# EAGLE board board (EAGLE 5.06)
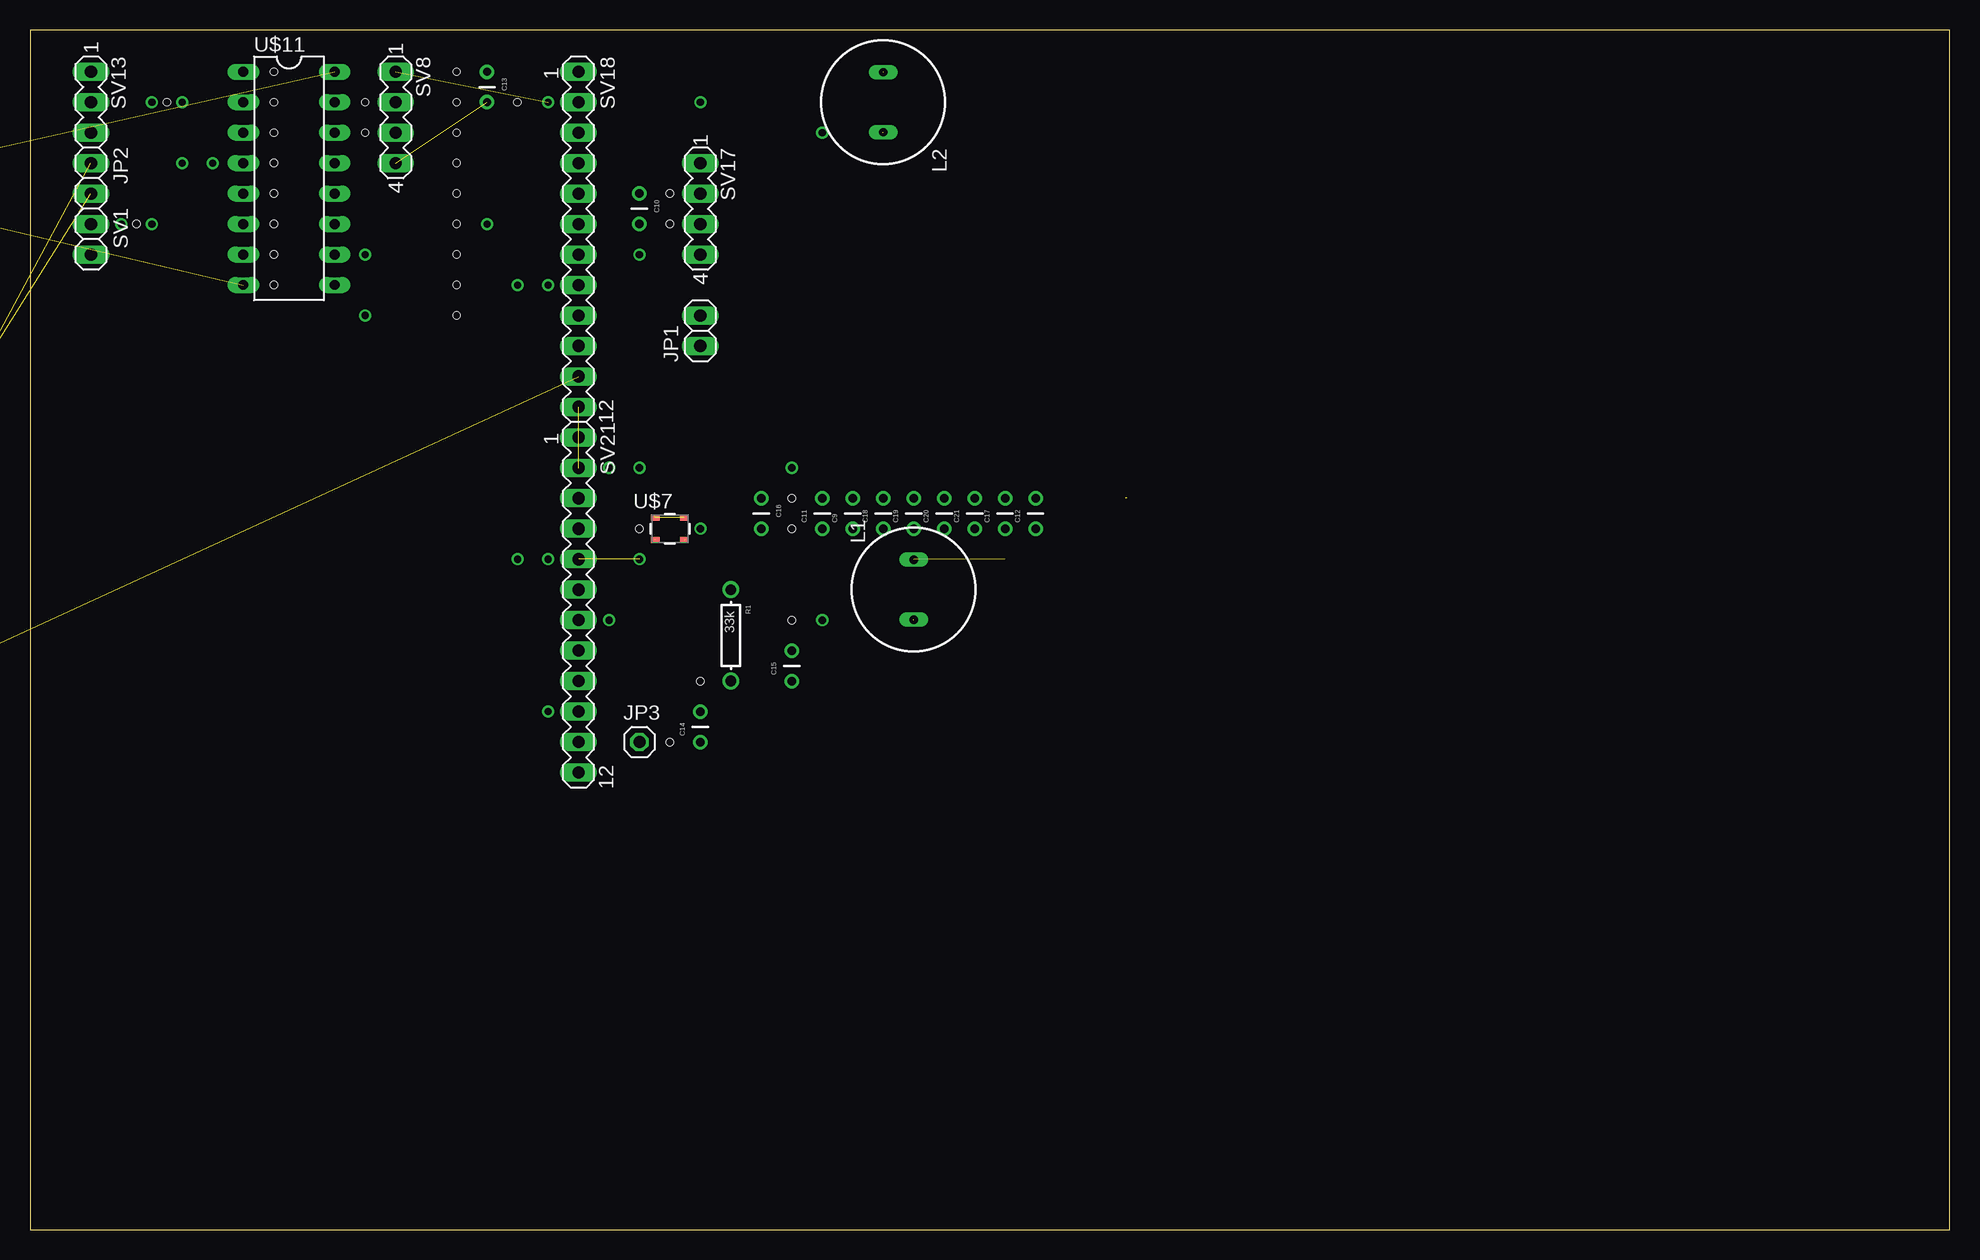
[diagram p0: board, top side]
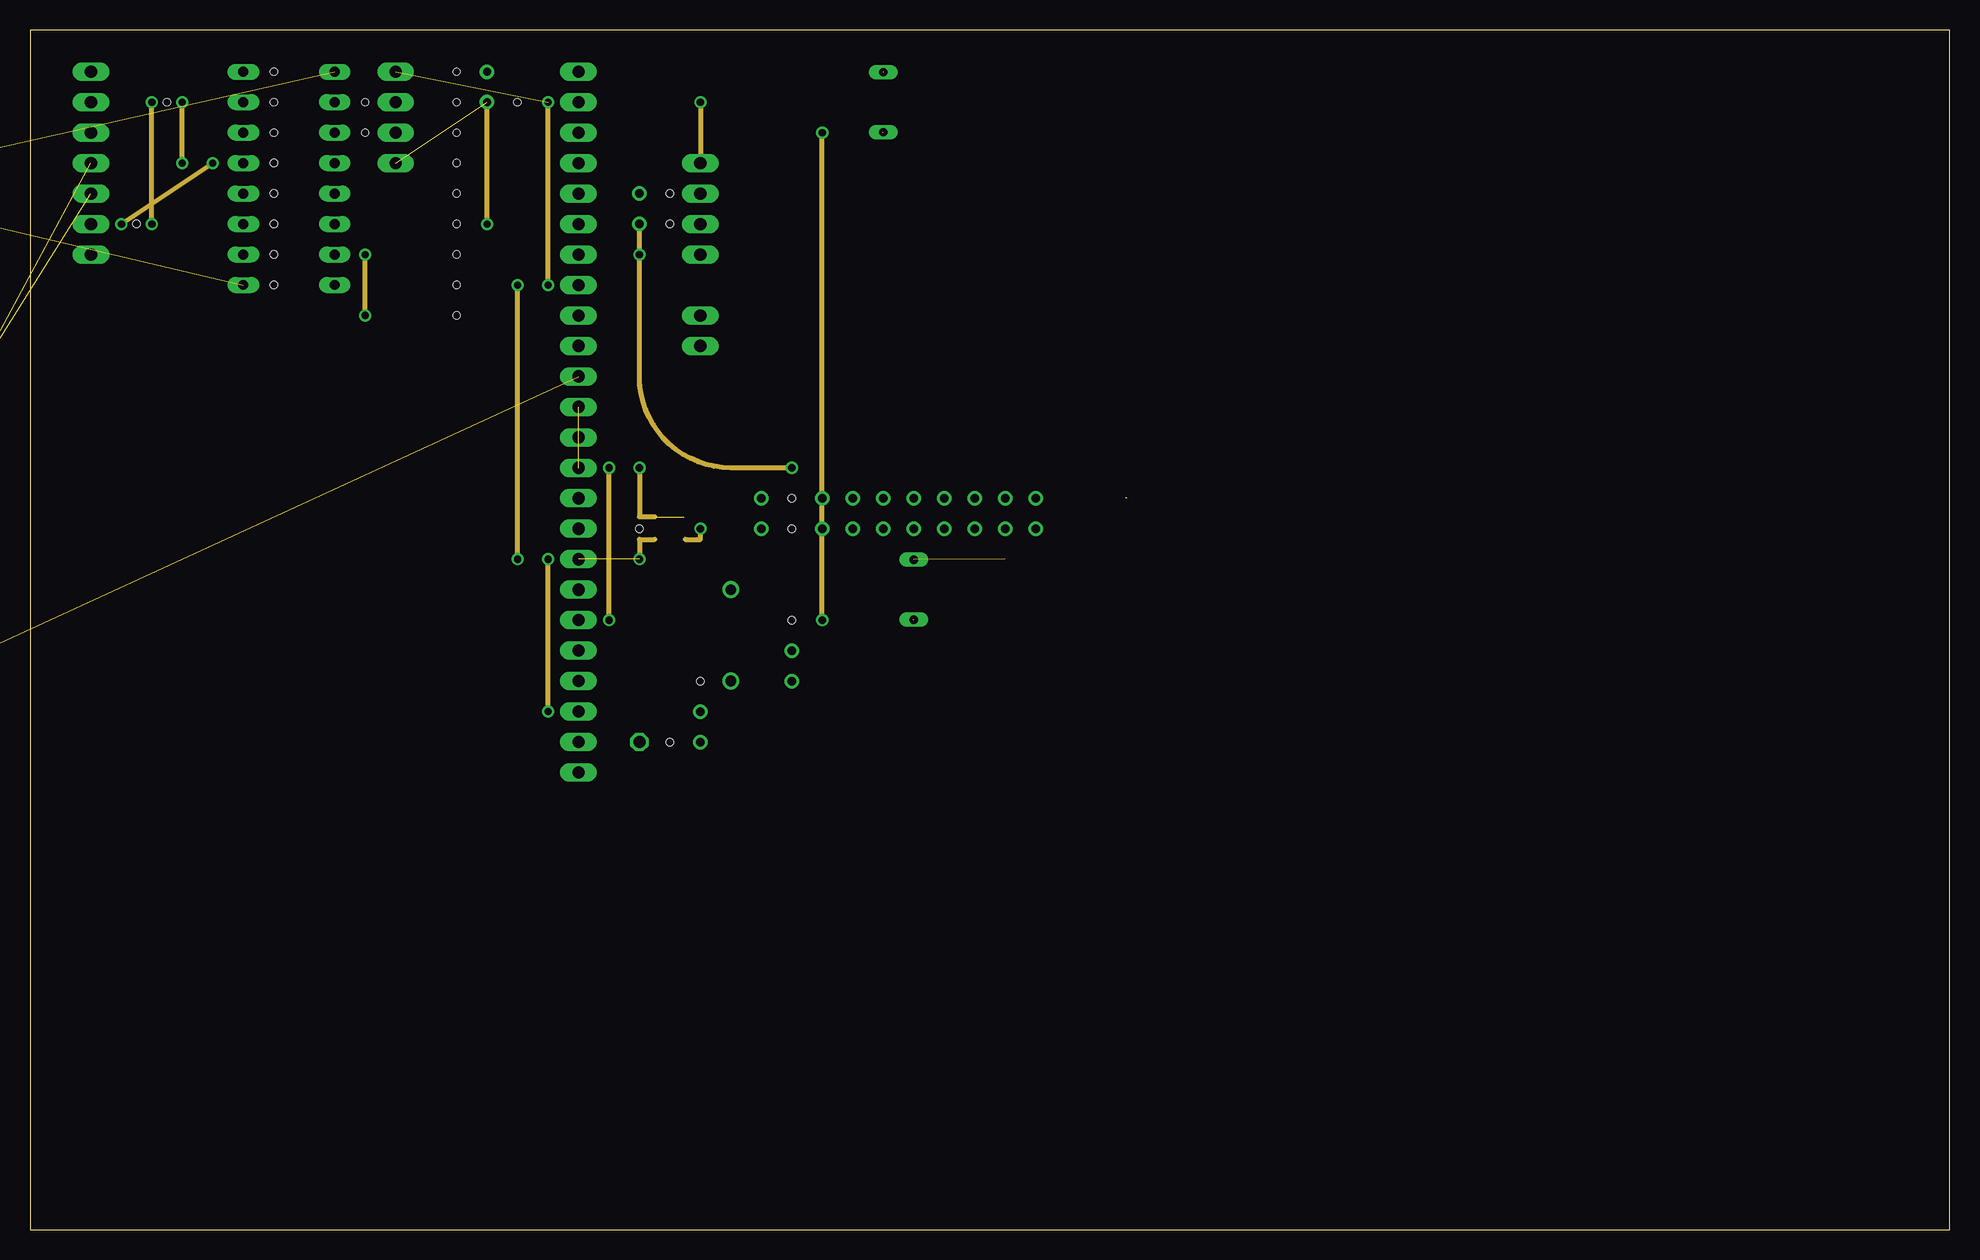
[diagram p1: board, inner layer Route15]
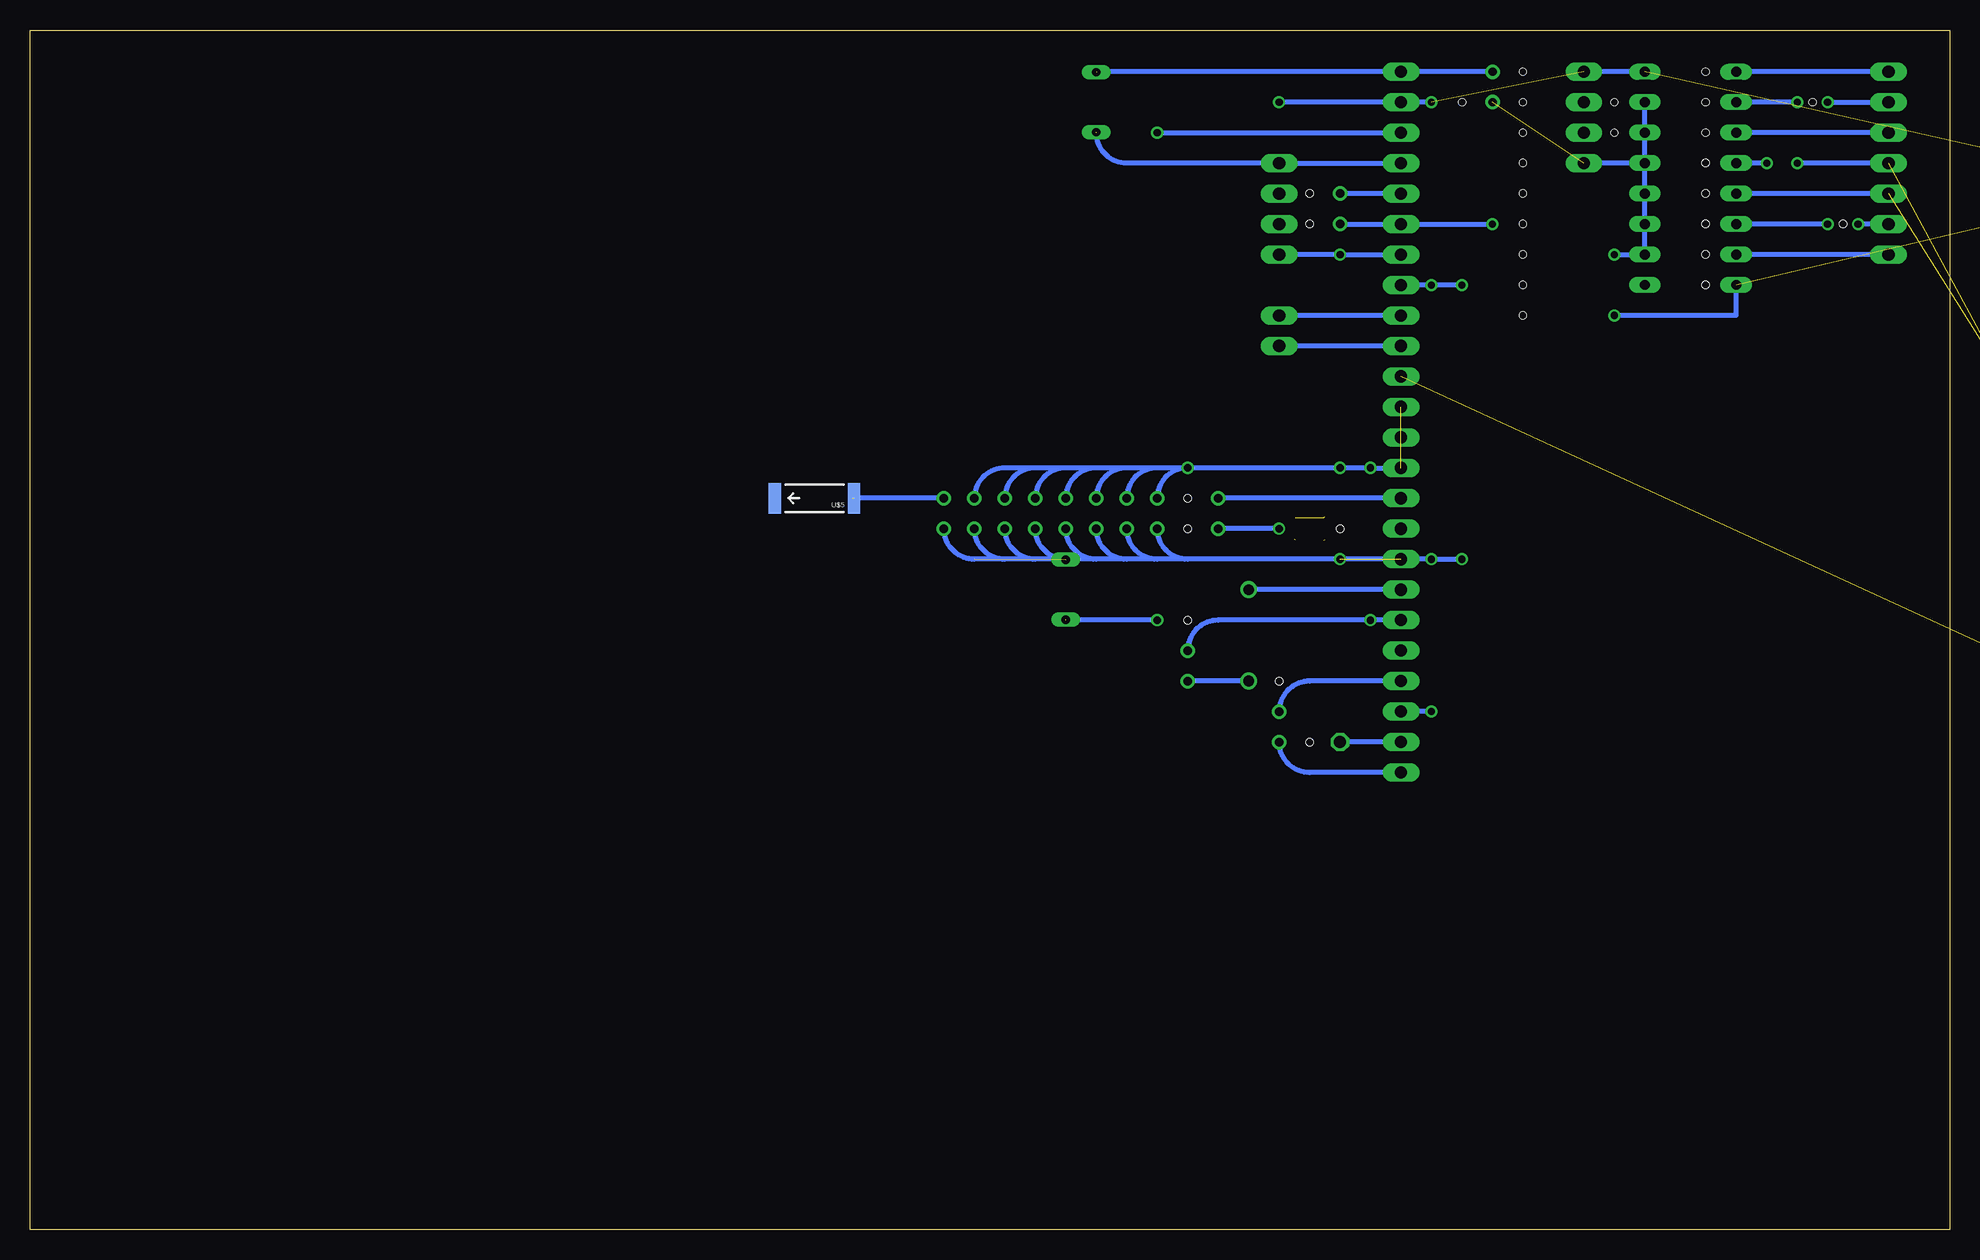
[diagram p2: board, bottom side, seen from below]

Size 160 x 100 mm. Coordinates in mm from the lower left corner, seen from the top.
Outline: 0,0 160,0 160,100 0,100 0,0
Copper layers (1*16): Top 0.035mm / dielectric 1.5mm / Bottom 0.035mm
Design rules "default": minimum track width 10mil, minimum drill 24mil, track to track 8mil, track to pad 8mil, pad to pad 8mil, via to via 8mil, smd to smd 8mil, copper to edge 40mil, drill to drill 8mil, minimum pad ring 10mil, minimum via ring 8mil, stop-mask expansion 4mil, vias tented up to drill 0mil, thermal gap 10mil
Holes 0.6 mm at 20.32,96.52 20.32,93.98 20.32,91.44 20.32,88.9 20.32,86.36 20.32,83.82 20.32,81.28 20.32,78.74 35.56,96.52 35.56,93.98 35.56,91.44 35.56,88.9 35.56,86.36 35.56,83.82 35.56,81.28 35.56,78.74 53.34,40.64 55.88,45.72 40.64,93.98 53.34,86.36 53.34,83.82 27.94,93.98 27.94,91.44 8.89,83.82 11.43,93.98 35.56,76.2 63.5,60.96 63.5,58.42 50.8,58.42 63.5,50.8

## Footprints (pad centres in the part's own frame; a part is rotated, then mirrored left to right if it is on the bottom)
C0402 = smd 0.7 x 0.9: 1 -0.65,0; 2 0.65,0
CAP-PTH-SMALL = drill 0.7 round: 1 0,0; 2 2.54,0
DF12(XX)-20DP-0.5V = smd 0.3 x 1.8: 1 -2.25,-1.9 | smd 0.3 x 1.6: 2 -2.25,1.8; 3 -1.75,-1.8; 4 -1.75,1.8; 5 -1.25,-1.8; 6 -1.25,1.8; 7 -0.75,-1.8; 8 -0.75,1.8; 9 -0.25,-1.8; 10 -0.25,1.8; 11 0.25,-1.8; 12 0.25,1.8; 13 0.75,-1.8; 14 0.75,1.8; 15 1.25,-1.8; 16 1.25,1.8; 17 1.75,-1.8; 18 1.75,1.8; 19 2.25,-1.8; 20 2.25,1.8 | smd 0.8 x 1.8: T1 4,0; T2 -4,0 | hole 0.635: 3.3,1.5; -3.3,1.5
DF12-20DS-0.5V = smd 0.3 x 1.8: 1 2.25,-1.9 | smd 0.3 x 1.6: 2 2.25,1.8; 3 1.75,-1.8; 4 1.75,1.8; 5 1.25,-1.8; 6 1.25,1.8; 7 0.75,-1.8; 8 0.75,1.8; 9 0.25,-1.8; 10 0.25,1.8; 11 -0.25,-1.8; 12 -0.25,1.8; 13 -0.75,-1.8; 14 -0.75,1.8; 15 -1.25,-1.8; 16 -1.25,1.8; 17 -1.75,-1.8; 18 -1.75,1.8; 19 -2.25,-1.8; 20 -2.25,1.8 | smd 0.8 x 1.8: T1 4,0; T2 -4,0 | hole 0.635: 3.3,1.5; -3.3,1.5
1X02 = drill 1.016 long: 1 -1.27,0; 2 1.27,0
1X01 = drill 1.016 octagon: 1 0,0
BS11 = drill 0.7 long: 1 -2.5,0; 2 2.5,0
AXIAL-0.3 = drill 0.9 round: P$1 -3.81,0; P$2 3.81,0
0805 = smd 0.8 x 1.2: 1 -0.9,0; 2 0.9,0
1X05 = drill 1.016 round: 1 0,0; 2 2.54,0; 3 5.08,0; 4 7.62,0; 5 10.16,0
MA04-1 = drill 1.016 long: 1 -3.81,0; 2 -1.27,0; 3 1.27,0; 4 3.81,0
MA06-1 = drill 1.016 long: 1 -6.35,0; 2 -3.81,0; 3 -1.27,0; 4 1.27,0; 5 3.81,0; 6 6.35,0
MA03-1 = drill 1.016 long: 1 -2.54,0; 2 0,0; 3 2.54,0
MA05-1 = drill 1.016 long: 1 -5.08,0; 2 -2.54,0; 3 0,0; 4 2.54,0; 5 5.08,0
MA12-1 = drill 1.016 long: 1 -13.97,0; 2 -11.43,0; 3 -8.89,0; 4 -6.35,0; 5 -3.81,0; 6 -1.27,0; 7 1.27,0; 8 3.81,0; 9 6.35,0; 10 8.89,0; 11 11.43,0; 12 13.97,0
TP09SQ = smd 0.9 x 0.9: TP 0,0
FH12A-10S-0.5SH(55) = smd 0.3 x 1.3: P$1 -2.25,0; P$2 -1.75,0; P$3 -1.25,0; P$4 -0.75,0; P$5 -0.25,0; P$6 0.25,0; P$7 0.75,0; P$8 1.25,0; P$9 1.75,0; P$10 2.25,0 | smd 3.6 x 2.2: P$11 -5.05,3.25; P$12 5.05,3.25
LFCSP-16 = smd 1.75 x 1.75: 0 0,0 | smd 0.65 x 0.37: 1 -1.75,0.975; 2 -1.75,0.325; 3 -1.75,-0.325; 4 -1.75,-0.975; 9 1.75,-0.975; 10 1.75,-0.325; 11 1.75,0.325; 12 1.75,0.975 | smd 0.37 x 0.65: 5 -0.975,-1.75; 6 -0.325,-1.75; 7 0.325,-1.75; 8 0.975,-1.75; 13 0.975,1.75; 14 0.325,1.75; 15 -0.325,1.75; 16 -0.975,1.75
SIGE4120 = smd 0.5 x 0.25: AGC_DIS -1.85,-1.25; FILT_BW 1.85,-0.75; FS_SEL1 1.85,-1.25; LNA_IN -1.85,0.25; P$16 1.85,0.25; VAGC -1.85,-0.75; VCC_AGC -1.85,0.75; VCC_LNA -1.85,1.25; VDD_FSE -1.85,-0.25; VDDQ 1.85,0.75; VTUNE 1.85,1.25; XTAL1 1.85,-0.25 | smd 0.25 x 0.5: CLK_OUT -0.25,-1.85; DATA_OUT 0.25,-1.85; FS_SEL0 1.25,-1.85; LNA_OUT -1.25,1.85; MIX_IN 0.25,1.85; OSC_EN 1.25,1.85; P$20 0.75,1.85; RX_EN -0.75,1.85; SYNC 0.75,-1.85; VCC -0.25,1.85; VDDN -0.75,-1.85; VSSN -1.25,-1.85 | smd 2.3 x 2.3: GND 0,0
ANTENNA-CHIP5 = smd 1.016 x 2.54: FEED -3.302,0; NC 3.302,0
TXCO = smd 0.7 x 0.5: P$1_GND -1.2,0.95; P$3_GND 1.2,0.95; P$4_OUTPUT 1.2,-0.95; P$6_VDD -1.2,-0.95
S-PQFP64-G64 = smd 1.2 x 0.3: 1 -5.7,3.75; 2 -5.7,3.25; 3 -5.7,2.75; 4 -5.7,2.25; 5 -5.7,1.75; 6 -5.7,1.25; 7 -5.7,0.75; 8 -5.7,0.25; 9 -5.7,-0.25; 10 -5.7,-0.75; 11 -5.7,-1.25; 12 -5.7,-1.75; 13 -5.7,-2.25; 14 -5.7,-2.75; 15 -5.7,-3.25; 16 -5.7,-3.75; 33 5.7,-3.75; 34 5.7,-3.25; 35 5.7,-2.75; 36 5.7,-2.25; 37 5.7,-1.75; 38 5.7,-1.25; 39 5.7,-0.75; 40 5.7,-0.25; 41 5.7,0.25; 42 5.7,0.75; 43 5.7,1.25; 44 5.7,1.75; 45 5.7,2.25; 46 5.7,2.75; 47 5.7,3.25; 48 5.7,3.75 | smd 0.3 x 1.2: 17 -3.75,-5.7; 18 -3.25,-5.7; 19 -2.75,-5.7; 20 -2.25,-5.7; 21 -1.75,-5.7; 22 -1.25,-5.7; 23 -0.75,-5.7; 24 -0.25,-5.7; 25 0.25,-5.7; 26 0.75,-5.7; 27 1.25,-5.7; 28 1.75,-5.7; 29 2.25,-5.7; 30 2.75,-5.7; 31 3.25,-5.7; 32 3.75,-5.7; 49 3.75,5.7; 50 3.25,5.7; 51 2.75,5.7; 52 2.25,5.7; 53 1.75,5.7; 54 1.25,5.7; 55 0.75,5.7; 56 0.25,5.7; 57 -0.25,5.7; 58 -0.75,5.7; 59 -1.25,5.7; 60 -1.75,5.7; 61 -2.25,5.7; 62 -2.75,5.7; 63 -3.25,5.7; 64 -3.75,5.7
VDFPN8 = smd 0.6 x 0.48: P$1 -3.65,1.905; P$2 -3.65,0.635; P$3 -3.65,-0.635; P$4 -3.65,-1.905; P$5 3.65,-1.905; P$6 3.65,-0.635; P$7 3.65,0.635; P$8 3.65,1.905
8-SOIC = smd 0.41 x 1.02: P$1-VOUT -0.975,-2.4; P$2-NC -0.325,-2.4; P$3-NC 0.325,-2.4; P$4-NC 0.975,-2.4; P$5-NC 0.975,2.4; P$6-NC 0.325,2.4; P$7-GND -0.325,2.4; P$8-VIN -0.975,2.4
DIL16 = drill 0.813 long: 1 -8.89,-3.81; 2 -6.35,-3.81; 3 -3.81,-3.81; 4 -1.27,-3.81; 5 1.27,-3.81; 6 3.81,-3.81; 7 6.35,-3.81; 8 8.89,-3.81; 9 8.89,3.81; 10 6.35,3.81; 11 3.81,3.81; 12 1.27,3.81; 13 -1.27,3.81; 14 -3.81,3.81; 15 -6.35,3.81; 16 -8.89,3.81
LED0402 = smd 0.7 x 0.5: P$1 -0.55,0; P$2 0.55,0

## Placement (x,y rotation side)
C1  100 nF  [C0402]  -77.47,81.28 0 top  (outside the outline)
C2  10 uF  [C0402]  -81.28,81.28 0 top  (outside the outline)
C3  0.1uF  [C0402]  -85.09,81.28 0 top  (outside the outline)
C4  0.1uF  [C0402]  -15.24,86.36 0 top  (outside the outline)
C5  .1u  [C0402]  -19.05,86.36 0 top  (outside the outline)
C6  0.1 uF  [C0402]  -22.86,86.36 0 top  (outside the outline)
C7  0.1 uF  [C0402]  -26.67,86.36 0 top  (outside the outline)
C8  0.1 uF  [C0402]  -30.48,86.36 0 top  (outside the outline)
C9  10n  [CAP-PTH-SMALL]  68.58,58.42 90 top
C10  10n  [CAP-PTH-SMALL]  50.8,86.36 270 top
C11  1.8p  [CAP-PTH-SMALL]  66.04,58.42 90 top
C12  22p  [CAP-PTH-SMALL]  83.82,58.42 90 top
C13  12p  [CAP-PTH-SMALL]  38.1,96.52 270 top
C14  22p  [CAP-PTH-SMALL]  55.88,40.64 90 top
C15  220p  [CAP-PTH-SMALL]  63.5,45.72 90 top
C16  10n  [CAP-PTH-SMALL]  60.96,60.96 270 top
C17  100n  [CAP-PTH-SMALL]  81.28,58.42 90 top
C18  10n  [CAP-PTH-SMALL]  71.12,58.42 90 top
C19  10n  [CAP-PTH-SMALL]  73.66,58.42 90 top
C20  10n  [CAP-PTH-SMALL]  76.2,58.42 90 top
C21  10n  [CAP-PTH-SMALL]  78.74,58.42 90 top
C22  10n  [CAP-PTH-SMALL]  -36.83,82.55 0 top  (outside the outline)
C23  0.1uF  [C0402]  -34.29,86.36 0 top  (outside the outline)
C24  10uF  [CAP-PTH-SMALL]  -41.91,82.55 0 top  (outside the outline)
C25  100nF  [CAP-PTH-SMALL]  -46.99,82.55 0 top  (outside the outline)
C26  10uF  [CAP-PTH-SMALL]  -52.07,82.55 0 top  (outside the outline)
C27  100nF  [CAP-PTH-SMALL]  -57.15,82.55 0 top  (outside the outline)
C28  100nF  [CAP-PTH-SMALL]  -62.23,82.55 0 top  (outside the outline)
C29  10uF  [CAP-PTH-SMALL]  -67.31,82.55 0 top  (outside the outline)
J1  DF12(5.0)-20DP-0.5V  [DF12(XX)-20DP-0.5V]  -17.78,19.05 0 top  (outside the outline)
J2  DF12-20DS-0.5V  [DF12-20DS-0.5V]  -27.94,19.05 0 top  (outside the outline)
JP1  GPS<->MUX  [1X02]  55.88,74.93 90 top
JP2  GPS<->MUX  [1X02]  5.08,87.63 270 top
JP3  GPS<->MCU  [1X01]  50.8,40.64 0 top
JP4  GPS<->MCU  [1X01]  -49.53,26.67 0 top  (outside the outline)
L1  10n  [BS11]  73.66,53.34 90 top
L2  33n  [BS11]  71.12,93.98 270 top
P1  DF12-20DS-0.5V  [DF12-20DS-0.5V]  -38.1,19.05 0 top  (outside the outline)
P2  DF12(5.0)-20DP-0.5V  [DF12(XX)-20DP-0.5V]  -48.26,19.05 0 top  (outside the outline)
R1  33k  [AXIAL-0.3]  58.42,49.53 270 top
R2  0.0  [0805]  -69.85,82.55 0 top  (outside the outline)
R3  150  [AXIAL-0.3]  -74.93,86.36 0 top  (outside the outline)
R4  33k  [C0402]  -38.1,86.36 0 top  (outside the outline)
R5  150  [AXIAL-0.3]  -17.78,90.17 0 top  (outside the outline)
R6  150  [AXIAL-0.3]  -27.94,90.17 0 top  (outside the outline)
R7  150  [AXIAL-0.3]  -38.1,90.17 0 top  (outside the outline)
R8  33k  [C0402]  -41.91,86.36 0 top  (outside the outline)
R9  33k  [C0402]  -45.72,86.36 0 top  (outside the outline)
R10  4M  [C0402]  -49.53,86.36 0 top  (outside the outline)
SL1  1  [1X05]  -64.77,17.78 0 top  (outside the outline)
SV1  Flash<->Mux  [1X02]  5.08,82.55 270 top
SV2  Flash<->Mux  [1X02]  -22.86,26.67 0 top  (outside the outline)
SV3  Flash<->MCU  [MA04-1]  -73.66,63.5 0 top  (outside the outline)
SV4  Flash<->MCU  [MA04-1]  -26.67,69.85 0 top  (outside the outline)
SV5  MCU<->Accel_LPF  [MA04-1]  -76.2,55.88 0 top  (outside the outline)
SV6  Accel<->Accel_LPF  [MA06-1]  -26.67,49.53 0 top  (outside the outline)
SV7  Flash PWR  [MA04-1]  -44.45,69.85 0 top  (outside the outline)
SV8  Mux PWR  [MA04-1]  30.48,92.71 270 top
SV9  Accel<->Accel_LPF  [MA06-1]  -49.53,49.53 0 top  (outside the outline)
SV10  MCU<->Accel_LPF  [MA04-1]  -30.48,63.5 0 top  (outside the outline)
SV11  Accel_LPF_PWR  [MA04-1]  -53.34,63.5 0 top  (outside the outline)
SV12  MCU<->Mux  [MA03-1]  -66.04,49.53 0 top  (outside the outline)
SV13  MCU<->Mux  [MA03-1]  5.08,93.98 270 top
SV14  LEDs  [MA04-1]  -20.32,76.2 0 top  (outside the outline)
SV15  LEDs  [MA04-1]  -34.29,76.2 0 top  (outside the outline)
SV16  RTC  [MA05-1]  -20.32,57.15 0 top  (outside the outline)
SV17  GPS PWR  [MA04-1]  55.88,85.09 270 top
SV18  GPS-QFN-A  [MA12-1]  45.72,82.55 270 top
SV19  GPS-QFN-B_dontplace  [MA12-1]  -62.23,34.29 0 top  (outside the outline)
SV20  GPS-QFN-A_dontplace  [MA12-1]  -29.21,41.91 0 top  (outside the outline)
SV21  GPS-QFN-B  [MA12-1]  45.72,52.07 270 top
TP5  TPTP09SQ  [TP09SQ]  -74.93,81.28 0 top  (outside the outline)
U$1  FH12A-10S-0.5SH(55)  [FH12A-10S-0.5SH(55)]  -41.91,55.88 0 top  (outside the outline)
U$2  ADXL330SMD  [LFCSP-16]  -52.07,57.15 0 top  (outside the outline)
U$3  SIGE4120  [SIGE4120]  -76.2,5.08 0 top  (outside the outline)
U$5  ANTENNA2SMD5  [ANTENNA-CHIP5]  94.61,60.96 180 bottom
U$7  TCXO  [TXCO]  53.34,58.42 0 top
U$8  MSP430F169IPM  [S-PQFP64-G64]  -30.48,7.62 0 top  (outside the outline)
U$9  M25P128  [VDFPN8]  -66.04,6.35 0 top  (outside the outline)
U$10  LM2936  [8-SOIC]  -57.15,57.15 0 top  (outside the outline)
U$11  74257_DIP-16  [DIL16]  21.59,87.63 270 top
U$12  LED  [LED0402]  -52.07,90.17 0 top  (outside the outline)
U$13  LED  [LED0402]  -54.61,90.17 0 top  (outside the outline)
U$14  LED  [LED0402]  -57.15,90.17 0 top  (outside the outline)
U$15  LED  [LED0402]  -59.69,90.17 0 top  (outside the outline)

## Library data of the parts
C1-C29 R1-R10 U$2 U$5 = SparkFun
J1 J2 P1 P2 = Hirose Connectors
JP1-JP4 SV1 SV2 = pinhead
L1 L2 = inductor-neosid
SL1 = SparkFun-3-2-07
SV3-SV21 = con-lstb
TP5 = testpad
U$1 U$3 U$7 U$9 U$11-U$15 = mylib
U$8 = msp430
U$10 = lm2936a

## Nets
5V: SV16.1
CLK-MC: JP2.2 SV20.9 U$3.CLK_OUT U$11.5
GND: C1.2 C2.2 C3.2 C4.2 C5.2 C6.2 C7.2 C8.2 C9.2 C10.2 C11.2 C13.2 C15.2 C17.2 C18.2 C19.2 C20.2 C21.2 C22.2 C23.2 C24.2 C25.2 C26.2 C27.2 C28.2 C29.2 J1.12 J1.14 J1.16 J2.12 J2.14 J2.16 P1.12 P1.14 P1.16 P2.12 P2.14 P2.16 R10.1 SV6.2 SV7.4 SV8.4 SV9.2 SV11.4 SV16.2 SV17.4 SV18.6 SV18.7 SV18.12 SV21.1 SV21.2 SV21.7 U$2.3 U$2.5 U$2.6 U$2.7 U$3.GND U$7.P$1_GND U$7.P$3_GND U$8.62 U$8.63 U$9.P$4 U$10.P$7-GND U$11.8 U$11.10 U$11.11 U$11.13 U$11.14 U$11.15 U$12.P$2 U$13.P$2 U$14.P$2 U$15.P$2
LED0: R6.P$2 SV14.1 SV15.1 U$8.12
LED1: R5.P$2 SV14.2 SV15.2 U$8.13
LED2: R7.P$2 SV14.3 SV15.3 U$8.14
LED3: R3.P$2 SV14.4 SV15.4 U$8.15
MUX_SELECT: SV13.1 U$11.1
N$1: SV4.1 U$8.36
N$2: C28.1 C29.1 U$8.7 U$8.10
N$3: U$1.P$8 U$8.54
N$4: SL1.1 U$8.31
N$5: C10.1 SV18.5
N$6: SL1.2 U$8.32
N$7: SV20.3 U$3.LNA_IN
N$8: C11.1 C12.1 L1.2
N$9: C12.2 U$5.FEED
N$10: SV20.1 U$3.VCC_LNA
N$11: SV19.12 U$3.LNA_OUT
N$12: C14.2 SV21.9
N$13: SV19.6 U$3.VTUNE
N$14: C15.1 R1.P$2
N$15: SV19.3 U$3.XTAL1
N$17: SV3.4 U$9.P$1
N$18: C2.1 R2.2
N$19: U$8.11
N$20: SL1.3 U$8.33
N$21: C26.1 C27.1 U$8.64
N$22: SL1.4 U$8.34
N$23: SL1.5 U$8.35
N$24: SV4.3 U$8.45
N$25: SV4.4 U$8.44
N$26: SV12.1 U$8.38
N$27: SV2.2 U$9.P$6
N$28: SV1.1 U$11.4
N$29: SV12.2 U$8.47
N$30: SV13.3 U$11.3
N$31: U$1.P$7 U$8.55
N$32: U$1.P$6 U$8.56
N$33: U$1.P$5 U$8.57
N$34: SV4.2 U$8.39
N$35: SV1.2 U$11.7
N$36: U$1.P$4 U$8.58
N$37: R3.P$1 U$12.P$1
N$38: JP4.1 U$8.37
N$39: R5.P$1 U$14.P$1
N$40: C16.2 U$7.P$4_OUTPUT
N$41: R7.P$1 U$13.P$1
N$42: L1.1 SV18.3
N$43: R6.P$1 U$15.P$1
N$44: SV2.1 U$9.P$5
N$45: C14.1 SV21.12
N$46: SV3.1 U$9.P$7
N$47: SV3.2 U$9.P$3
N$48: C1.1 J1.6 J1.8 J1.10 J2.6 J2.8 J2.10 P1.6 P1.8 P1.10 P2.6 P2.8 P2.10 U$10.P$8-VIN
N$49: SV3.3 U$9.P$2
N$50: C13.1 L2.1 SV18.1
N$51: SV20.2 U$3.VCC_AGC
N$52: SV12.3 U$8.29
N$53: SV13.2 U$11.6
N$55: SV20.4 U$3.VDD_FSE
N$56: SV20.5 U$3.VAGC
N$57: SV20.6 U$3.AGC_DIS
N$58: SV20.7 U$3.VSSN
N$59: SV20.8 U$3.VDDN
N$60: JP1.2 SV18.9
N$61: JP1.1 SV18.10
N$62: JP3.1 SV21.11
N$63: SV20.12 U$3.FS_SEL0
N$64: SV19.10 U$3.VCC
N$65: SV19.9 U$3.MIX_IN
N$66: SV19.7 U$3.OSC_EN
N$67: SV19.5 U$3.VDDQ
N$68: R1.P$1 SV21.6
N$69: C16.1 SV21.3
N$70: SV19.2 U$3.FILT_BW
N$71: SV19.1 U$3.FS_SEL1
N$74: JP2.1 SV20.10 U$3.DATA_OUT U$11.2
RX_EN: SV19.11 U$3.RX_EN
SCL: SV16.4
SDA: SV16.5
SQW: SV16.3
ST: R10.2 SV5.4 SV6.6 SV9.6 SV10.4 U$2.2 U$8.2
SYNC-MC: SV18.11 SV20.11 U$3.SYNC
VCC: C5.1 C9.1 C17.1 C18.1 C19.1 C20.1 C21.1 C22.1 C24.1 C25.1 L2.2 R2.1 SV6.1 SV7.1 SV8.1 SV9.1 SV11.1 SV17.1 SV18.2 SV18.4 SV18.8 SV21.5 SV21.10 TP5.TP U$2.14 U$2.15 U$7.P$6_VDD U$8.1 U$9.P$8 U$10.P$1-VOUT U$11.16
XOUT: C6.1 R4.1 SV6.3 SV9.3 U$2.12
XOUT-MC: C3.1 R4.2 SV5.1 SV10.1 U$8.59
YOUT: C7.1 R8.1 SV6.4 SV9.4 U$2.10
YOUT-MC: C4.1 R8.2 SV5.2 SV10.2 U$8.60
ZOUT: C8.1 R9.1 SV6.5 SV9.5 U$2.8
ZOUT-MC: C23.1 R9.2 SV5.3 SV10.3 U$8.61

## Tracks (layer width: path | path; a pad name or v marks a point on that pad's centre or on a via)
CLK-MC  (2 unrouted)
  Bottom 0.406: JP2.2 U$11.5
GND  (via drill 0.6)  (52 unrouted)
  Route15 0.406: v38.1,83.82 C13.2 | v27.94,76.2 v27.94,81.28 | C10.2 v50.8,81.28 50.8,71.12 arc90 58.42,63.5 v63.5,63.5 | 52.07,59.44 50.8,59.44 v50.8,63.5 | v48.26,50.8 v48.26,63.5
  Bottom 0.406: U$11.15 U$11.14 U$11.13 | U$11.13 25.4,86.36 U$11.11 U$11.10 v27.94,81.28 | SV21.7 v48.26,50.8 60.96,50.8 arc-90 C15.2 | v38.1,83.82 SV18.6 C10.2 | U$11.13 SV8.4 | U$11.8 17.78,76.2 v27.94,76.2 | SV18.7 v50.8,81.28 SV17.4 | SV21.2 v48.26,63.5 v50.8,63.5 v63.5,63.5 | v63.5,63.5 arc-90 C11.2 | v63.5,63.5 66.04,63.5 | 66.04,63.5 arc-90 C9.2 | v63.5,63.5 66.04,63.5 | 66.04,63.5 68.58,63.5 | 68.58,63.5 arc-90 C18.2 | v63.5,63.5 66.04,63.5 | 66.04,63.5 68.58,63.5 | 68.58,63.5 71.12,63.5 | 71.12,63.5 arc-90 C19.2 | v63.5,63.5 66.04,63.5 | 66.04,63.5 68.58,63.5 | 68.58,63.5 71.12,63.5 | 71.12,63.5 73.66,63.5 | 73.66,63.5 arc-90 C20.2 | v63.5,63.5 66.04,63.5 | 66.04,63.5 68.58,63.5 | 68.58,63.5 71.12,63.5 | 71.12,63.5 73.66,63.5 | 73.66,63.5 76.2,63.5 | 76.2,63.5 arc-90 C21.2 | v63.5,63.5 66.04,63.5 | 66.04,63.5 68.58,63.5 | 68.58,63.5 71.12,63.5 | 71.12,63.5 73.66,63.5 | 73.66,63.5 76.2,63.5 | 76.2,63.5 78.74,63.5 arc-90 C17.2
LED0  (3 unrouted)
LED1  (3 unrouted)
LED2  (3 unrouted)
LED3  (3 unrouted)
MUX_SELECT
  Bottom 0.406: SV13.1 U$11.1
N$1  (1 unrouted)
N$2  (3 unrouted)
N$3  (1 unrouted)
N$4  (1 unrouted)
N$5
  Bottom 0.406: SV18.5 C10.1
N$6  (1 unrouted)
N$7  (1 unrouted)
N$8  (1 unrouted)
  Bottom 0.406: C11.1 arc-90 63.5,55.88 45.72,55.88 81.28,55.88 arc90 C12.1
N$9  (1 unrouted)
  Bottom 0.406: C12.2 91.44,60.96
N$10  (1 unrouted)
N$11  (1 unrouted)
N$12
  Bottom 0.406: C14.2 arc90 53.34,45.72 SV21.9
N$13  (1 unrouted)
N$14
  Bottom 0.406: R1.P$2 C15.1
N$15  (1 unrouted)
N$16  (via drill 0.6)
  other vias: 50.8,55.88
N$17  (1 unrouted)
N$18  (1 unrouted)
N$20  (1 unrouted)
N$21  (2 unrouted)
N$22  (1 unrouted)
N$23  (1 unrouted)
N$24  (1 unrouted)
N$25  (1 unrouted)
N$26  (1 unrouted)
N$27  (1 unrouted)
N$28  (via drill 0.6)
  Route15 0.406: v7.62,83.82 v15.24,88.9
  Bottom 0.406: SV1.1 v7.62,83.82 | v15.24,88.9 U$11.4
N$29  (1 unrouted)
N$30
  Bottom 0.406: SV13.3 U$11.3
N$31  (1 unrouted)
N$32  (1 unrouted)
N$33  (1 unrouted)
N$34  (1 unrouted)
N$35
  Bottom 0.406: SV1.2 U$11.7
N$36  (1 unrouted)
N$37  (1 unrouted)
N$38  (1 unrouted)
N$39  (1 unrouted)
N$40  (via drill 0.6)  (1 unrouted)
  Route15 0.406: 54.61,57.53 55.88,57.53 v55.88,58.42
  Bottom 0.406: v55.88,58.42 C16.2
N$41  (1 unrouted)
N$42  (via drill 0.6)  (1 unrouted)
  Route15 0.406: v66.04,50.8 v66.04,91.44
  Bottom 0.406: v66.04,50.8 73.66,50.8 | v66.04,91.44 SV18.3
N$43  (1 unrouted)
N$44  (1 unrouted)
N$45
  Bottom 0.406: C14.1 arc-90 53.34,38.1 SV21.12
N$46  (1 unrouted)
N$47  (1 unrouted)
N$48  (13 unrouted)
N$49  (1 unrouted)
N$50  (1 unrouted)
  Bottom 0.406: C13.1 SV18.1 71.12,96.52
N$51  (1 unrouted)
N$52  (1 unrouted)
N$53  (via drill 0.6)
  Route15 0.406: v10.16,83.82 v10.16,93.98
  Bottom 0.406: v10.16,93.98 SV13.2 | v10.16,83.82 U$11.6
N$55  (1 unrouted)
N$56  (1 unrouted)
N$57  (1 unrouted)
N$58  (1 unrouted)
N$59  (1 unrouted)
N$60
  Bottom 0.406: SV18.9 JP1.2
N$61
  Bottom 0.406: SV18.10 JP1.1
N$62
  Bottom 0.406: SV21.11 JP3.1
N$63  (1 unrouted)
N$64  (1 unrouted)
N$65  (1 unrouted)
N$66  (1 unrouted)
N$67  (1 unrouted)
N$68
  Bottom 0.406: SV21.6 R1.P$1
N$69
  Bottom 0.406: SV21.3 C16.1
N$70  (1 unrouted)
N$71  (1 unrouted)
N$74  (via drill 0.6)  (2 unrouted)
  Route15 0.406: v12.7,88.9 v12.7,93.98
  Bottom 0.406: v12.7,93.98 U$11.2 | JP2.1 v12.7,88.9
RX_EN  (1 unrouted)
ST  (6 unrouted)
SYNC-MC  (2 unrouted)
VCC  (via drill 0.6)  (19 unrouted)
  Route15 0.406: v55.88,93.98 SV17.1 | v43.18,78.74 v43.18,93.98 | v40.64,55.88 v40.64,78.74 | 52.07,57.53 50.8,57.53 50.8,55.88 | v43.18,43.18 v43.18,55.88
  Bottom 0.406: U$11.16 SV8.1 | SV18.4 SV17.1 68.58,88.9 arc90 71.12,91.44 | C9.1 arc-90 66.04,55.88 SV21.5 | C18.1 arc-90 68.58,55.88 SV21.5 | C19.1 arc-90 71.12,55.88 SV21.5 | C20.1 arc-90 73.66,55.88 SV21.5 | C21.1 arc-90 76.2,55.88 SV21.5 | C17.1 arc-90 78.74,55.88 SV21.5 | v43.18,93.98 SV18.2 v55.88,93.98 | SV18.8 v43.18,78.74 v40.64,78.74 | v40.64,55.88 v43.18,55.88 SV21.5 | v43.18,43.18 SV21.10
XOUT  (4 unrouted)
XOUT-MC  (4 unrouted)
YOUT  (4 unrouted)
YOUT-MC  (4 unrouted)
ZOUT  (4 unrouted)
ZOUT-MC  (4 unrouted)